# Altium PCB UV_Disinfection_Relay_Hw00.PcbDoc
Units mm, origin at the board's own origin, x right, y up, seen from the top; angles counter-clockwise.
Board outline 71 x 68 mm, 2 copper layers (Top Layer, Bottom Layer); 31 components, 16 nets, 89 pads, 0 vias.
Unrouted connection lines stored in the file: 6.
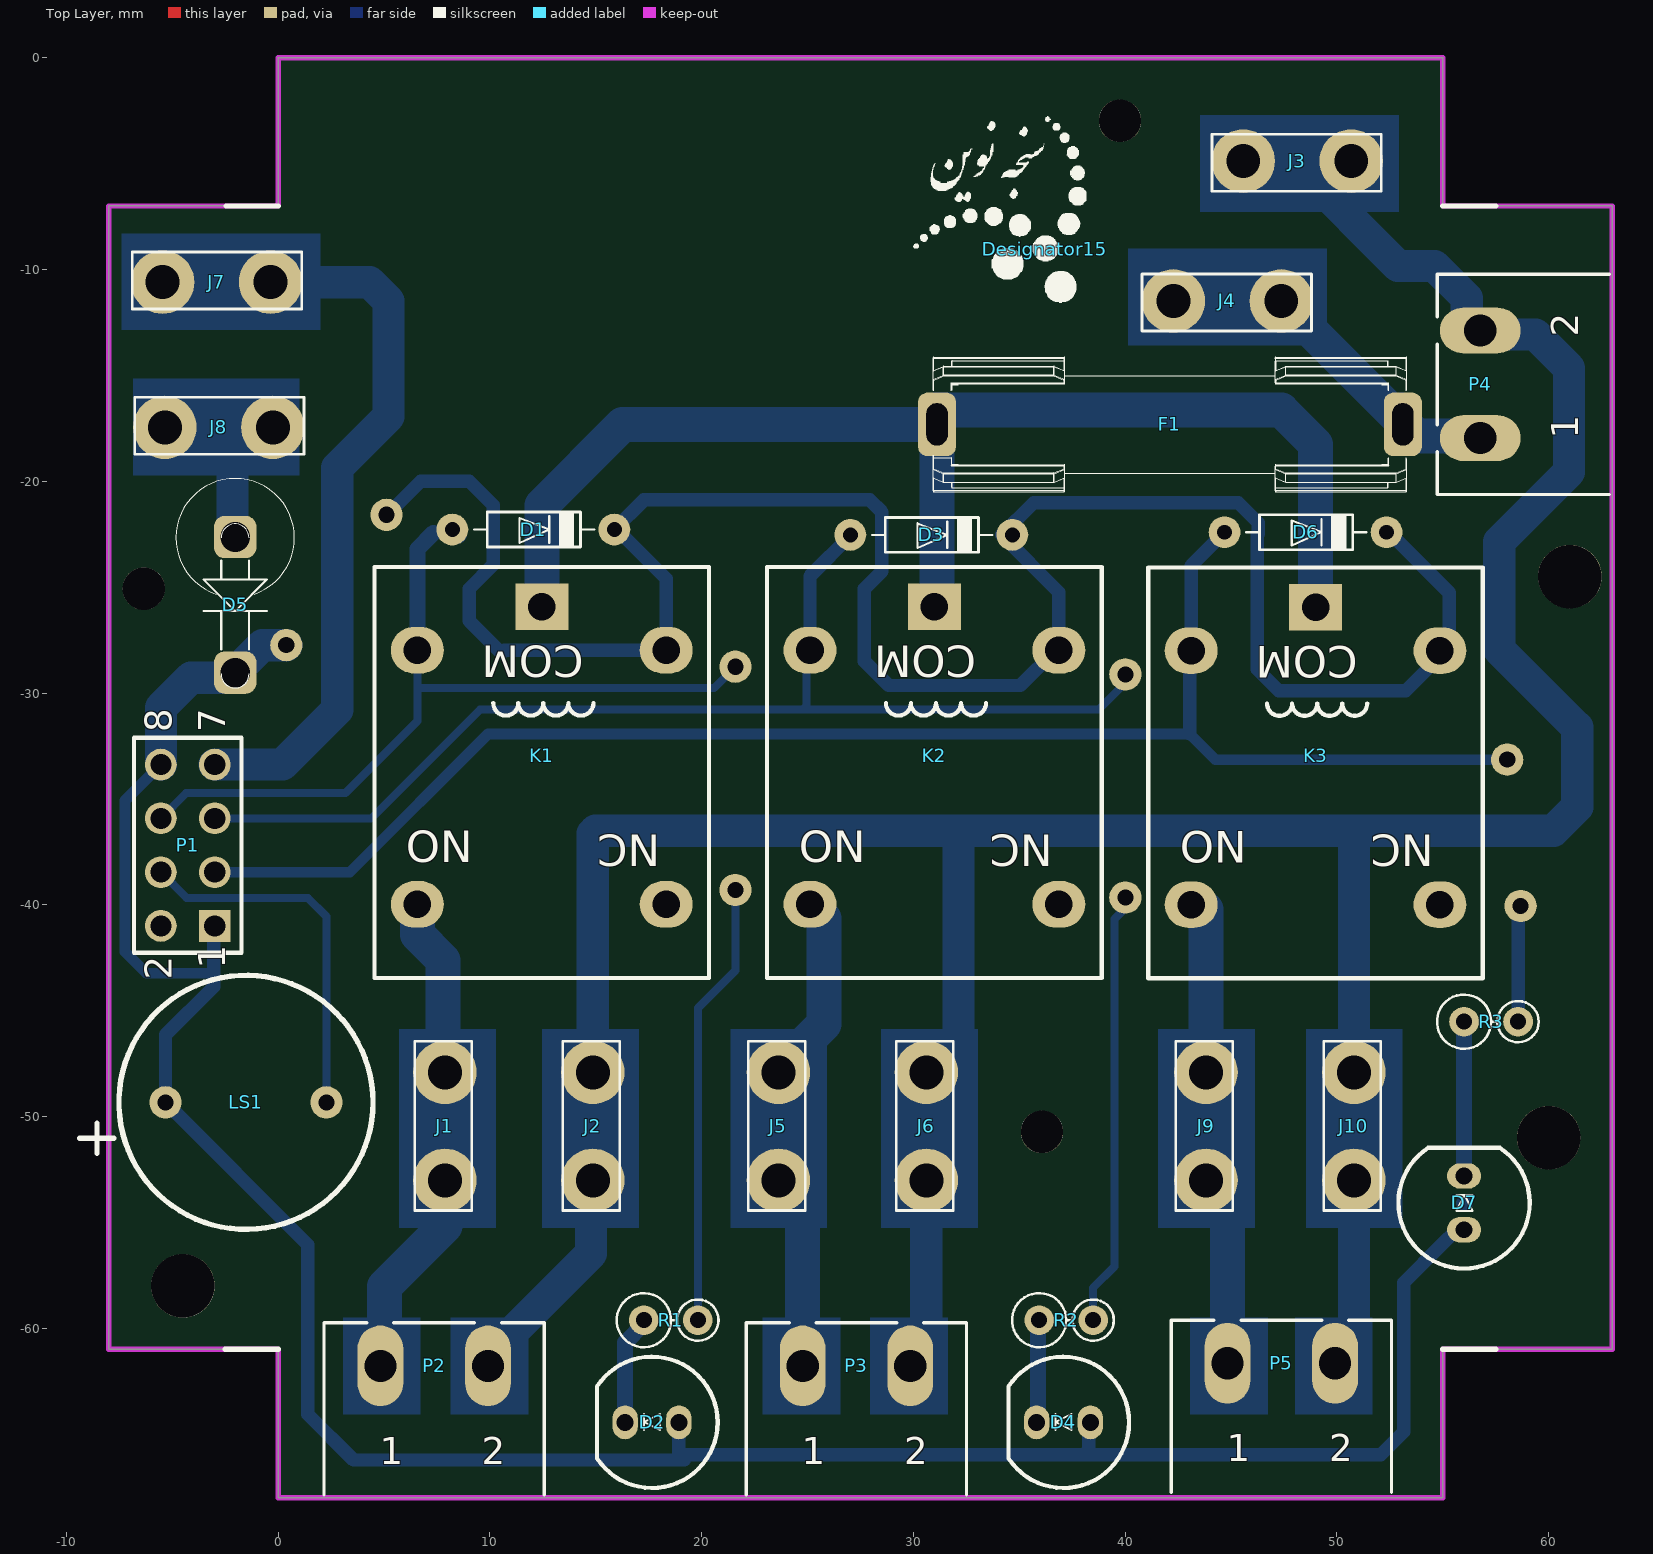
[diagram p0: Top Layer view]
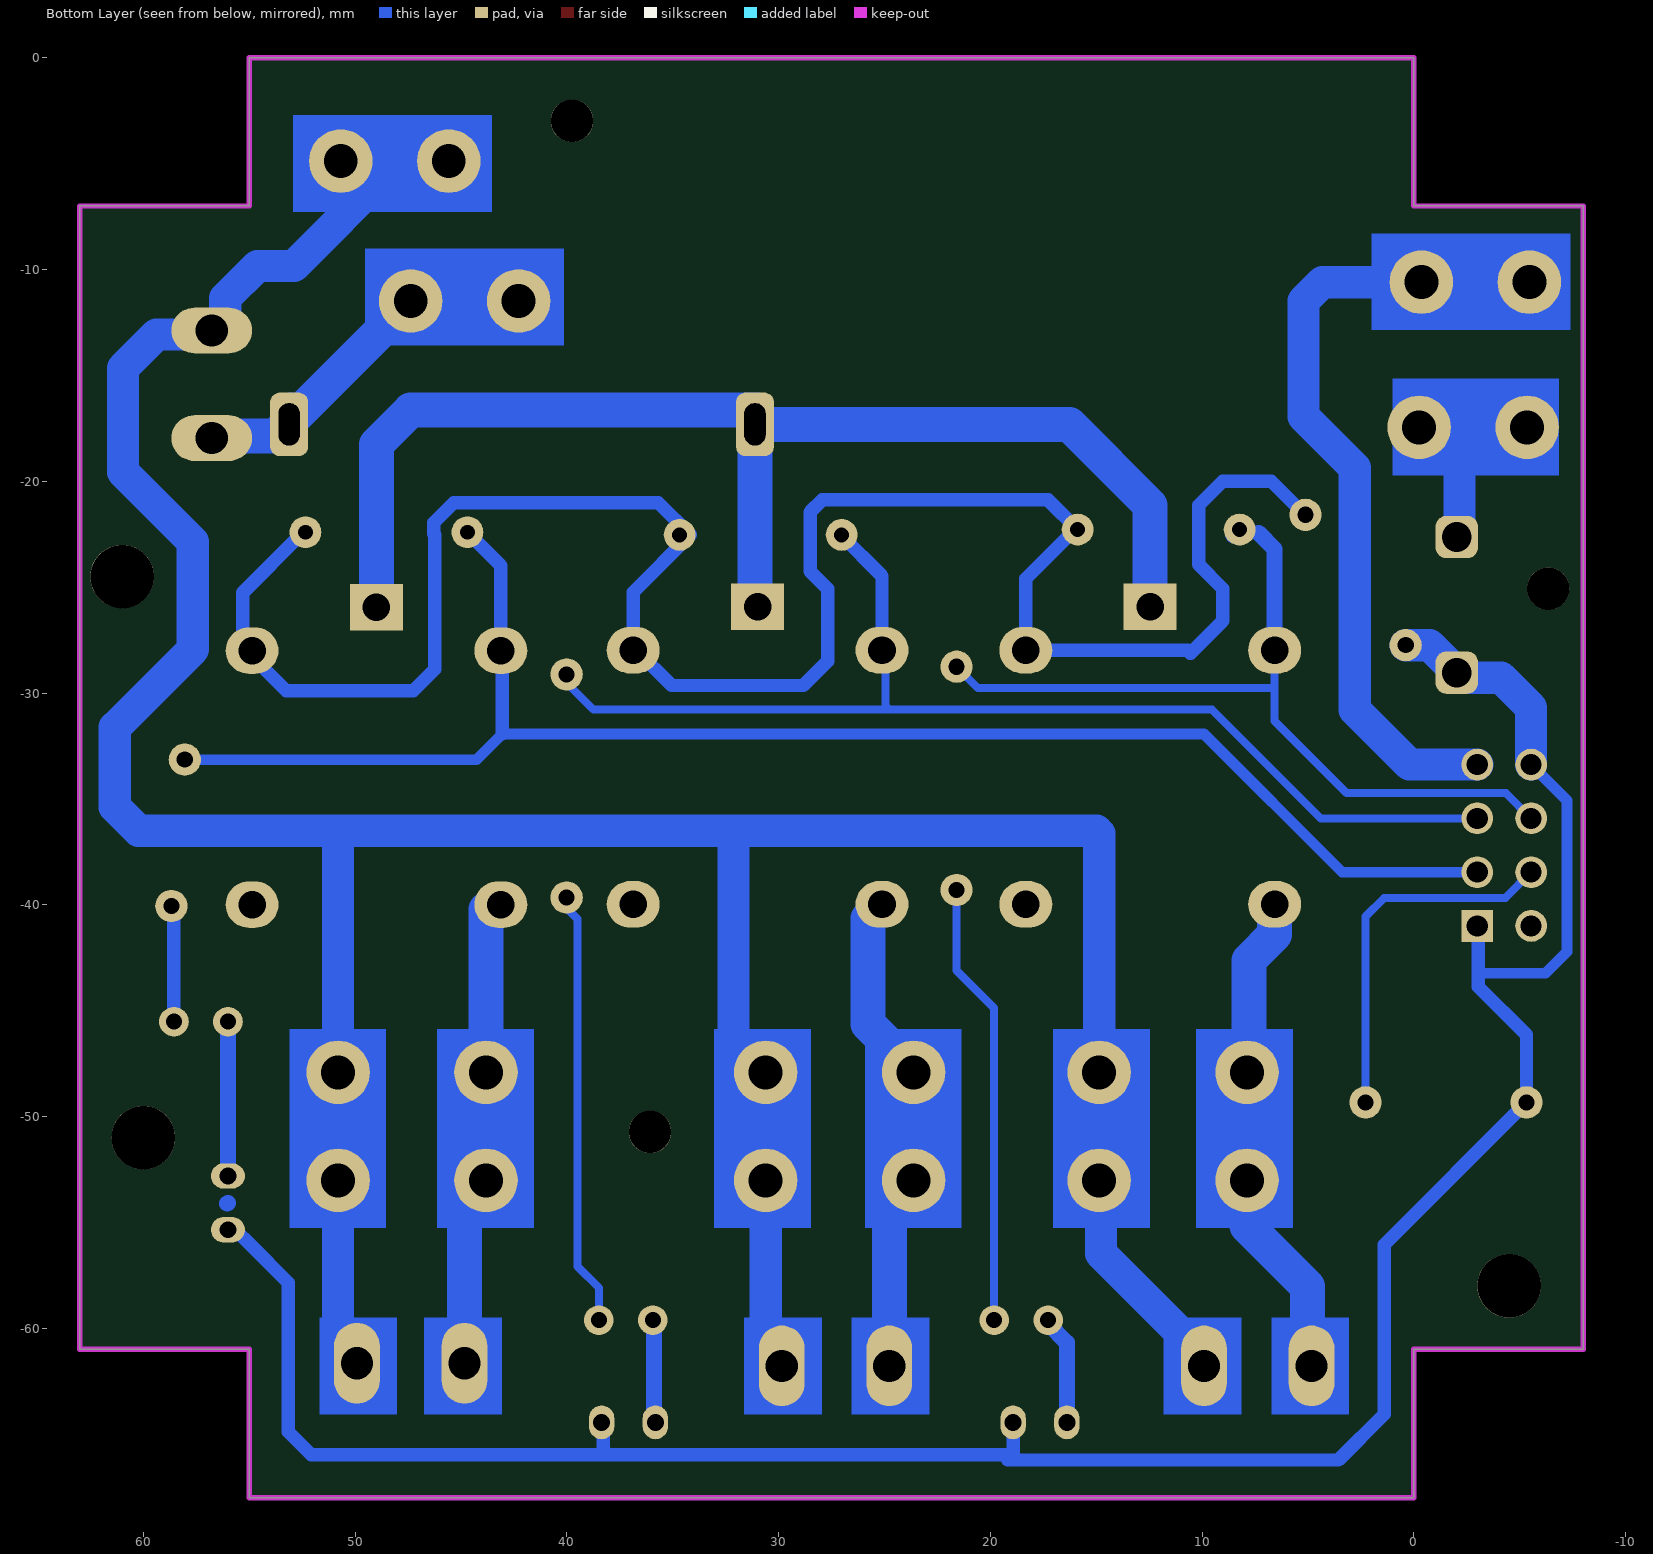
[diagram p1: Bottom Layer view, seen from below]
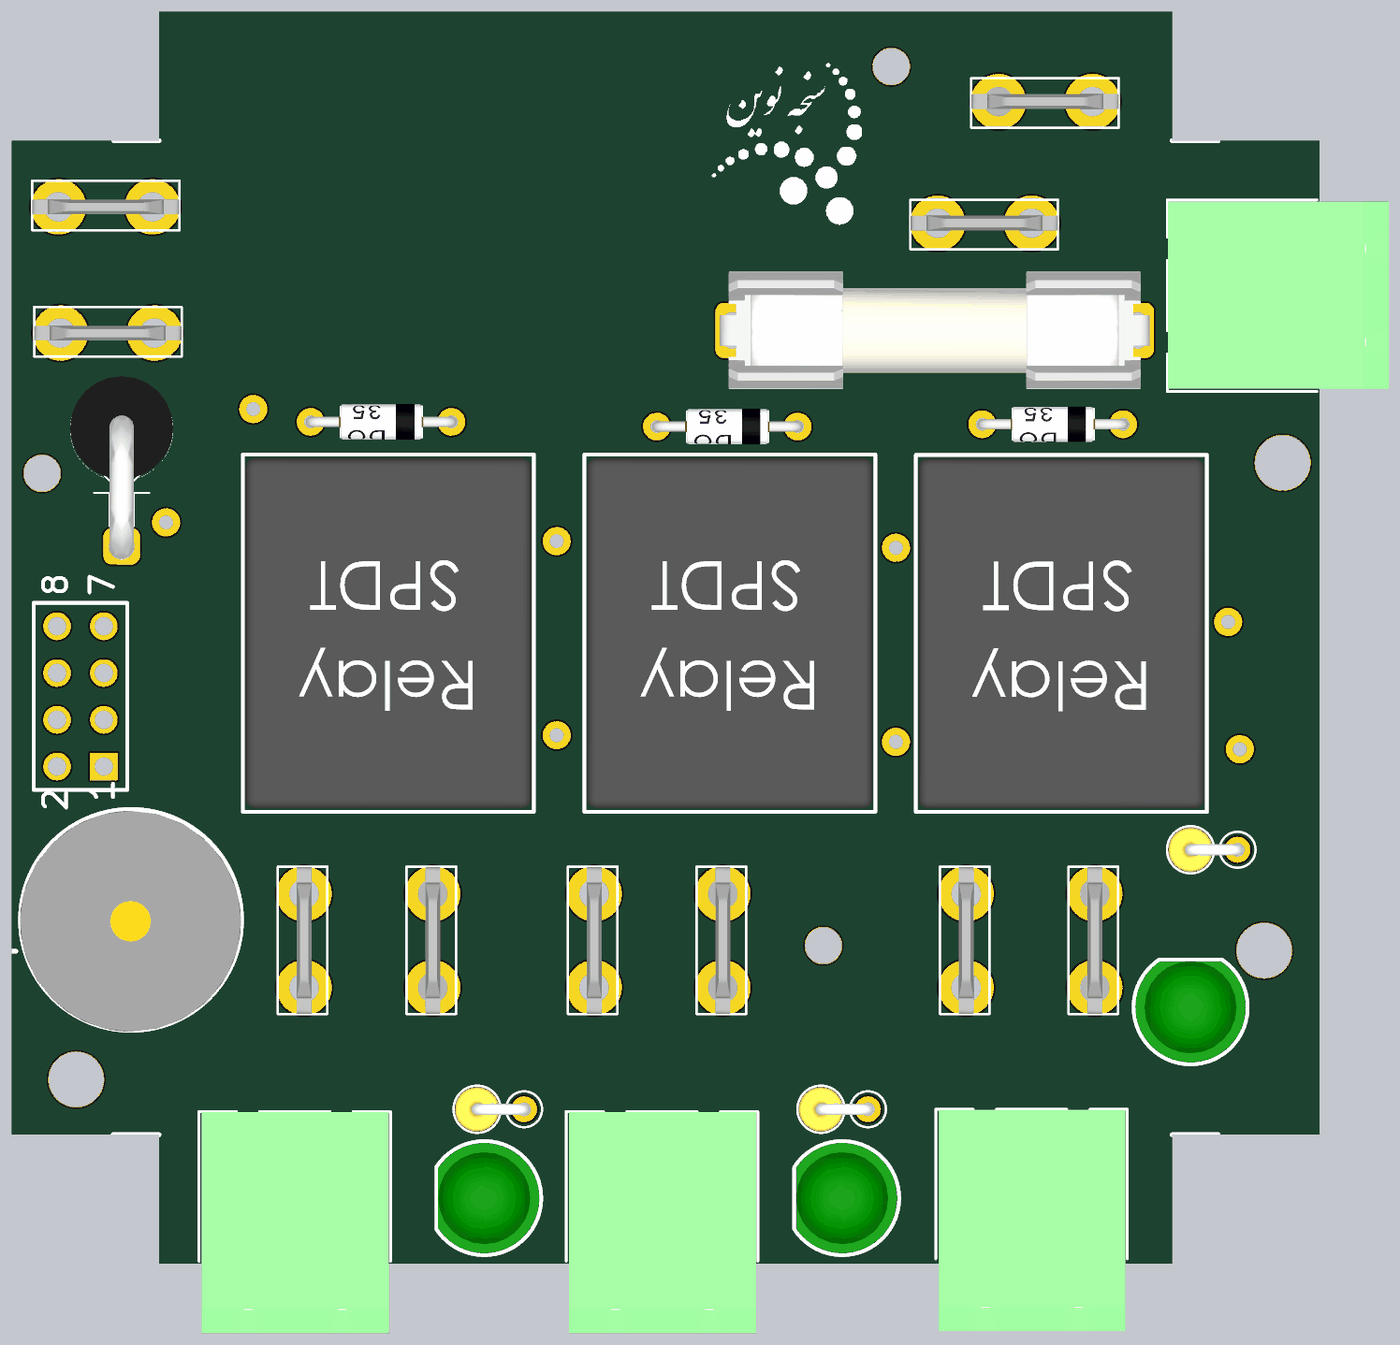
[diagram p2: 3D render of the assembled board from above, using the file's embedded part models]

## Layer stack, top to bottom
Top Solder: solder mask 0.0102, Solder Resist, Dk 3.5
Top Layer: signal copper 0.0356
Dielectric 1: dielectric 0.32, FR-4, Dk 4.8
Bottom Layer: signal copper 0.0356
Bottom Solder: solder mask 0.0102, Solder Resist, Dk 3.5

## Board outline
-8,-61 -8,-7 0,-7 0,0 55,0 55,-7 63,-7 63,-61 55,-61 55,-68 0,-68 0,-61

## Design rules (kind name [scope] priority, off if disabled: settings)
Clearance [All] p1: gap=0.254 ignorepadtopadclearanceinfootprint=TRUE
ComponentClearance [All] p1 off: gap=0.254 collisioncheckmode=3 verticalgap=0.254 showdistances=FALSE
HoleSize [All] p1: absolutevalues=TRUE maxlimit=25.4 minlimit=0.025 maxpercent=80.000 minpercent=20.000
PolygonConnect [All] p1: connectstyle=Relief reliefconductorwidth=0.254 reliefentries=4 polygonreliefangle="90 Angle" airgapwidth=0.254
RoutingVias [All] p1: holewidth=0.711 width=1.27 viastyle="Through Hole" minholewidth=0.711 minwidth=1.27 maxholewidth=0.711 maxwidth=1.27
SolderMaskExpansion [All] p1: expansion=0.102 istentingtop=FALSE
Width [All] p1: maxlimit=5.08 minlimit=0.254 preferedwidth=0.508 minimp=50.000000 maximp=50.000000 favimp=50.000000
28 further rules are at their usual default settings.

## Components (designator, comment, footprint, x,y, rotation, side; value= is the part's Value field where it differs from the comment)
D1 "1n4148" "DO 35" 12.05,-22.28 r180 top
D2 "LED0" LED5MM_GRN 17.653,-64.444 r180 top
D3 "1n4148" "DO 35" 30.846,-22.534 r180 top
D4 "LED0" LED5MM_GRN 37.084,-64.444 r180 top
D5 "Diode 1N4007" "DO-201AD - vertical" -2.032,-25.836 r270 top
D6 "1n4148" "DO 35" 48.514,-22.407 r180 top
D7 "LED0" LED5MM_GRN 56.002,-54.079 r90 top
Designator15 "Comment" LOGO_PARS_TOP 36.195,-9.017 r0 top
F1 "F=1.0 A" "Fuse 5x20" 42.112,-17.311 r90 top
J1 "Phase_RELAY2" COOLER_TEMINAL_M_6.3MM#1 7.874,-53.014 r90 top
J2 "NULL" COOLER_TEMINAL_M_6.3MM#2 14.859,-53.014 r90 top
J3 "NULL" COOLER_TEMINAL_M_6.3MM#2 50.673,-4.881 r180 top
J4 "Phase" COOLER_TEMINAL_M_6.3MM#1 47.371,-11.485 r180 top
J5 "Phase_RELAY2" COOLER_TEMINAL_M_6.3MM#1 23.622,-53.014 r90 top
J6 "NULL" COOLER_TEMINAL_M_6.3MM#2 30.607,-53.014 r90 top
J7 "Positive" COOLER_TEMINAL_M_6.3MM#1 -5.461,-10.596 r0 top
J8 "Negative" COOLER_TEMINAL_M_6.3MM#1 -5.354,-17.454 r0 top
J9 "Phase_RELAY2" COOLER_TEMINAL_M_6.3MM#1 43.815,-53.014 r90 top
J10 "NULL" COOLER_TEMINAL_M_6.3MM#2 50.8,-53.014 r90 top
K1 "RELAY_MILON_5V" "Relay 18.85x15.35x15.70" 12.447,-32.955 r180 top
K2 "RELAY_MILON_5V" "Relay 18.85x15.35x15.70" 30.989,-32.955 r180 top
K3 "RELAY_MILON_5V" "Relay 18.85x15.35x15.70" 48.989,-32.97 r180 top
LS1 "Buzzer" BUZZER_12A05 -1.524,-49.331 r180 top
P1 "Header 4X2" HDR2X4 -3,-41 r90 top
P2 "Header 2" "MSTB 2,5/2-G-5,08" 7.366,-61.777 r0 top
P3 "Header 2" "MSTB 2,5/2-G-5,08" 27.305,-61.777 r0 top
P4 "Header 2" "MSTB 2,5/2-G-5,08" 56.769,-15.422 r90 top
P5 "Header 2" "MSTB 2,5/2-G-5,08" 47.371,-61.65 r0 top
R1 "1K" "Axial 0_25w_2_54mm" 18.542,-59.618 r0 top
R2 "1K" "Axial 0_25w_2_54mm" 37.211,-59.618 r0 top
R3 "1K" "Axial 0_25w_2_54mm" 57.277,-45.521 r0 top

## Footprints (in the part's own frame and the unit in brackets; to place one, negate y for a bottom-side part, rotate by r counter-clockwise, add the part's x,y. Pads: shape width x height; smd on the part's side, far side on the other; paste and mask are expansions set on the pad)
"Axial 0_25w_2_54mm" [mm] "Designer Abbas Basereh"
  round 1.4 hole 0.75: 1(1.275,0) 2(-1.275,0)
  silkscreen extent -2.55,-1.28 2.25,1.28, body extent -2.47,-1.2 1.57,1.2, height 9.4
BUZZER_12A05 [mil]
  round 60 hole 30: 1(149.61,0) 2(-149.61,0)
  silkscreen extent -236,-236 309,236, body extent -235,-233 237,239, height 374
COOLER_TEMINAL_M_6.3MM#1 [mm] "PC250 6.3mm Cooler Male Terminal"
  round 3 hole 1.6: 1(0,0) 1(5.1,0)
  silkscreen extent -1.43,-1.27 6.58,1.42, body extent -1.43,-0.41 6.57,0.39, height 11
COOLER_TEMINAL_M_6.3MM#2 [mm] "PC250 6.3mm Cooler Male Terminal"
  round 3 hole 1.6 mask+0.102: 1(0,0) 1(5.1,0)
  silkscreen extent -1.43,-1.27 6.58,1.42, body extent -1.43,-0.41 6.57,0.39, height 11
"DO 35" [mm] "Diode"
  round 1.5 hole 0.7: 1(3.825,0) 2(-3.825,0)
  silkscreen extent -2.87,-0.85 2.8,0.85, body extent -4.1,-0.96 4.08,0.96, height 2.46
"DO-201AD - vertical" [mm] "Designer Abbas Basereh"
  rrect50% 2x2 hole 1.4: 1(-3.2,0) 2(3.2,0)
  silkscreen extent -5.96,-2.8 3.93,2.8, body extent -6.04,-2.8 3.84,2.8, height 15.69
"Fuse 5x20" [mm] "Dsigner : Abbas Basereh"
  rrect50% 3x1.8 hole 1 slot 2 at 0 deg: 1(0,11) 2(0,-11)
  silkscreen extent -3.18,-11.19 3.18,11.19, body extent -3.17,-11.69 3.17,11.69, height 8.63
HDR2X4 [mm] "Connector; Header; 4x2 Position"
  rect 1.5x1.5 hole 1: 1(0,0)
  round 1.5 hole 1: 2(0,2.54) 3(2.54,0) 4(2.54,2.54) 5(5.08,0) 6(5.08,2.54) 7(7.62,0) 8(7.62,2.54)
  silkscreen extent -1.27,-1.27 8.89,3.81
LED5MM_GRN [mm] "LED 5MM THROUGH HOLE GREEN-Designer Abbas Basereh"
  oval 1.2x1.6 hole 0.8: 1(-1.27,0) 2(1.27,0)
  silkscreen extent -3.1,-3.1 2.6,3.1, body extent -3,-3 2.5,3, height 9.14
LOGO_PARS_TOP [mm]
  silkscreen extent -6.2,-2.54 1.96,6.25
"MSTB 2,5/2-G-5,08" [mil] "Header, Nominal current: 12 A Rated voltage (III/2): 320 V Number of positions: 2 Pitch: 5.08 mm Color: green Contact surface: Tin Assembly: Soldering DESIGNER:ABBAS BASEREH"
  oval 85x150 hole 60: 1(-100,0)
  oval 85x150 hole 60 mask+4: 2(100,0)
  silkscreen extent -205,-240 205,80, body extent -199,-394 201,79, height 340
"Relay 18.85x15.35x15.70" [mm] "DESIGNER ABBAS BASEREH"
  rect 2.5x2.2 hole 1.3: 1(0,-7.025)
  oval 2.5x2.2 hole 1.3: 2(-5.875,7.025) 3(5.875,7.025) 4(-5.875,-4.975) 5(5.875,-4.975)
  silkscreen extent -7.9,-8.9 7.9,10.5, body extent -7.75,-8.7 7.75,10.3, height 15.6

## Part data
D1 D3 D6: library part "Diode 1N4007", "1 Amp General Purpose Rectifier", Code_JEDEC=DO-204-AL, ComponentLink1Description="Manufacturer Link", ComponentLink1URL=http://www.fairchildsemi.com/, ComponentLink2Description=Datasheet, ComponentLink2URL=http://www.fairchildsemi.com/ds/1N%2F1N4001.pdf, DatasheetVersion=1998, LatestRevisionDate=17-Jul-2002, LatestRevisionNote="Re-released for DXP Platform.", PackageDescription="Diode, Axial; Body 5.2 x 2.7 mm (LxDia. max), Lead Dia. 0.86 mm (max)", PackageReference=DO-41, PackageVersion=Aug-1999, Published=8-Jun-2000, Publisher="Altium Limited"
D2 D4 D7: "Typical INFRARED GaAs LED", LatestRevisionDate=08-Jul-2005, LatestRevisionNote="Mech Layer 1 removed.", PackageDescription="LED; 2 Leads", PackageReference=LED-0, Published=8-Jun-2000, Publisher="Altium Limited"
D5: "1 Amp General Purpose Rectifier", Code_JEDEC=DO-204-AL, ComponentLink1Description="Manufacturer Link", ComponentLink1URL=http://www.fairchildsemi.com/, ComponentLink2Description=Datasheet, ComponentLink2URL=http://www.fairchildsemi.com/ds/1N%2F1N4001.pdf, DatasheetVersion=1998, LatestRevisionDate=17-Jul-2002, LatestRevisionNote="Re-released for DXP Platform.", PackageDescription="Diode, Axial; Body 5.2 x 2.7 mm (LxDia. max), Lead Dia. 0.86 mm (max)", PackageReference=DO-41, PackageVersion=Aug-1999, Published=8-Jun-2000, Publisher="Altium Limited"
F1: library part "Fuse 5x20 with holdeer pins", "Fuses 5x20", Data=28-12-2016, Desc.="fuse with holder pins 5x20", Designer="Abbas Basereh"
J1 J2 J3 J4 J5 J6 J7 J8 J9 J10: library part Socket, "Socket", LatestRevisionDate=17-Jul-2002, LatestRevisionNote="Re-released for DXP Platform.", Publisher="Altium Limited"
K1 K2 K3: library part Relay_SPDT, "RELAY 5V 7A 1C 5PIN", ComponentLink1Description=Datasheet, Designer="Abbas Basereh", Mounting Technology=Through-Hole, Pin Count=0, Update Date=2017-3-1
LS1: "Magnetic Transducer Buzzer", ComponentLink1Description="Manufacturer Link", ComponentLink1URL=http://www.megastar.com/linecard/buzzmode/index.php, DatasheetVersion=17-Dec-2003, LatestRevisionDate=17-Dec-2003, LatestRevisionNote="Schematic revised, PCB Footprint replaced.", PackageDescription="Magnetic Transducer Buzzer", PackageReference=ABSM-1574, Published=24-Mar-1999, Publisher="Altium Limited"
P1: "Header, 4-Pin, Dual row", LatestRevisionDate=17-Jul-2002, LatestRevisionNote="Re-released for DXP Platform.", Publisher="Altium Limited"
P2 P3 P4 P5: "Header, 2-Pin", LatestRevisionDate=17-Jul-2002, LatestRevisionNote="Re-released for DXP Platform.", Publisher="Altium Limited"
R1 R2 R3: library part Res1, "Resistor", LatestRevisionDate=17-Jul-2002, LatestRevisionNote="Re-released for DXP Platform.", PackageDescription="Axial Device, Thru-Hole; 2 Leads; 0.3 in Pin Spacing", PackageReference=AXIAL-0.3, Published=8-Jun-2000, Publisher="Altium Limited"

## Free pads (board coordinates)
  round 2 hole 2: 4(-6.35,-25.074) 4(36.068,-50.728) 4(39.751,-2.976)
  round 3 hole 3: 4(-4.5,-58) 4(60,-51) 4(61,-24.5)
  round 1.524 hole 0.762: 5(5.115,-21.582) 5(21.59,-39.298) 5(40.005,-39.66) 5(58.674,-40.06) 6(0.381,-27.741) 6(21.59,-28.757) 6(40.005,-29.119) 6(58.039,-33.147)

## Nets (pads, with @x,y where several pads share a name; then routed paths per layer and width w, separated by ;. In a path a pad name is that pad's centre, name@x,y a point inside that pad or via, vN(x,y) a via of type N, cw(c..) or ccw(c..) an arc to the next point about the centre after c; other vN are vias at no path point)
+5V: D1.2 D2.1 D3.2 D4.1 D5.2 D6.2 D7.1 K1.4 K2.4 K3.4 LS1.1 P1.1 P1.8 pad.5@5.115,-21.582 pad.6@0.381,-27.741 | length 221.7
  Bottom Layer w0.508: P1.8 -7.239,-35.079 -7.239,-42.219 -6.223,-43.235 -3.048,-43.235
  Bottom Layer w0.635: P1.1 -3.048,-41.048 -3.048,-43.235 -3.048,-43.87 -5.324,-46.146 LS1.1 1.397,-56.052 1.397,-64.063 3.556,-66.222 18.923,-66.222 19.177,-66.222 18.923,-65.968 ; pad.5@5.115,-21.582 5.143,-21.582 6.731,-19.994 9.017,-19.994 10.16,-21.137 10.16,-23.931 9.017,-25.074 9.017,-26.598 10.532,-28.113 10.55,-28.113 10.683,-27.98 K1.4 18.322,-24.606 D1.2@16.25,-22.534 ; D1.2 17.272,-20.883 27.94,-20.883 28.512,-21.455 28.512,-24.249 27.686,-25.074 27.686,-28.503 28.829,-29.646 35.048,-29.646 36.714,-27.98 K2.4 36.864,-25.241 34.157,-22.534 35.681,-21.01 45.339,-21.01 46.282,-21.953 46.282,-22.48 46.228,-22.534 46.228,-28.884 47.244,-29.9 53.242,-29.9 55.162,-27.98 55.312,-27.98 55.312,-25.274 D6.2@52.572,-22.534 ; D2.1 18.923,-65.968 ; D4.1 38.27,-64.528 38.27,-65.732 38.035,-65.968 ; D7.1 55.649,-55.349 54.936,-56.062 53.15,-57.848 53.15,-64.889 52.07,-65.968 38.27,-65.968 38.035,-65.968 ; 18.923,-65.968 19.177,-65.968 38.035,-65.968
  Bottom Layer w1.524: P1.8 -5.54,-30.694 -4.12,-29.274 -2.27,-29.274 D5.2 -0.737,-27.741 pad.6@0.381,-27.741
BUZZER_A: LS1.2 P1.4 | length 17.5
  Bottom Layer w0.381: P1.4 -4.321,-39.679 1.397,-39.679 2.276,-40.558 LS1.2
GND: J7.1 P1.2 P1.7 | length 38.2
  Bottom Layer w1.524: J7.1@-5.461,-10.596 -0.361,-10.596 4.314,-10.596 5.207,-11.489 5.207,-16.946 2.794,-19.359 2.794,-30.789 0.203,-33.38 P1.7
NetD2_2: D2.2 R1.2 | length 5.2
  Bottom Layer w0.762: D2.2 16.383,-60.675 17.267,-59.791 R1.2
NetD4_2: D4.2 R2.2 | length 4.9
  Bottom Layer w0.762: D4.2 35.875,-64.383 35.875,-59.679 R2.2
NetD5_1: D5.1 J8.1 | length 10.3
  Bottom Layer w1.524: J8.1@-5.354,-17.454 -2.159,-17.454 ; D5.1 -2.159,-22.509 -2.159,-17.454 ; J8.1@-0.254,-17.454 -2.159,-17.454
NetD7_2: D7.2 R3.2 | length 7.3
  Bottom Layer w0.762: 56.002,-54.079 56.037,-54.114 ; D7.2 R3.2
NetF1_2: F1.2 J4.1 P4.1 | length 12.8
  Bottom Layer w1.651: J4.1@47.371,-11.485 F1.2@53.037,-17.151 ; F1.2@53.037,-16.637 F1.2@53.037,-17.151 ; F1.2 53.037,-17.237 F1.2@53.037,-17.151 ; P4.1 56.672,-17.865 53.751,-17.865 F1.2@53.037,-17.151
NetJ1_1: J1.1 K1.3 P2.1 | length 23.6
  Bottom Layer w1.651: P2.1 5.016,-61.587 5.016,-58.031 7.874,-55.173 7.874,-53.014 7.874,-47.914 7.786,-47.826 7.786,-42.622 6.572,-41.408 K1.3
NetJ5_1: J5.1 K2.3 P3.1 | length 21.7
  Bottom Layer w1.651: J5.1@23.622,-53.014 23.622,-47.914 23.622,-47.79 25.781,-45.631 25.781,-40.647 K2.3 ; P3.1 24.765,-54.281
NetJ9_1: J9.1 K3.3 P5.1 | length 20.6
  Bottom Layer w1.651: K3.3@43.562,-39.98 43.815,-40.233 43.815,-47.914 J9.1@43.815,-53.014 ; P5.1 44.831,-54.154
NULL: J2.1 J3.1 J6.1 J10.1 P2.2 P3.2 P4.2 P5.2 | length 171.9
  Bottom Layer w1.524: P2.2 9.906,-61.333 14.771,-56.468 14.771,-53.102 14.859,-53.014 14.859,-47.914 14.859,-36.631 14.986,-36.504 32.131,-36.504 ; P3.2 29.845,-60.883 30.607,-60.121 30.607,-53.014 30.607,-47.914 30.607,-47.79 32.131,-46.266 32.131,-36.504 ; J3.1@45.573,-4.881 48.387,-4.881 J3.1@50.673,-4.881 ; 48.387,-5.334 52.887,-9.834 54.61,-9.834 56.134,-11.358 56.134,-12.765 56.251,-12.882 P4.2 56.96,-13.073 59.373,-13.073 60.96,-14.66 60.96,-19.558 57.658,-22.86 57.658,-27.94 61.341,-31.623 61.341,-35.388 60.225,-36.504 50.8,-36.504 ; P5.2 49.911,-60.756 50.8,-59.867 50.8,-53.014 50.8,-47.914 50.8,-36.504 ; 32.131,-36.504 50.8,-36.504
PHASE_IN: F1.1 K1.1 K2.1 K3.1 | length 60.1
  Bottom Layer w1.651: K1.1 12.447,-21.138 12.446,-21.137 16.256,-17.327 30.347,-17.327 30.362,-17.311 30.962,-17.311 31.037,-17.237 31.037,-16.637 47.371,-16.637 48.989,-18.255 K3.1 K3.1@49.133,-25.802 ; K2.1 31.115,-25.804 F1.1@31.115,-17.962
RELAY1_A: D1.1 K1.5 P1.6 pad.5@21.59,-39.298 pad.6@21.59,-28.757 R1.1 | length 59.4
  Bottom Layer w0.381: P1.6 -4.345,-34.726 3.176,-34.726 6.572,-31.329 6.572,-29.9 ; K1.5 6.572,-29.9 ; R1.1 19.817,-44.881 21.59,-43.108 pad.5@21.59,-39.679 ; pad.6@21.59,-28.757 20.574,-29.773 6.699,-29.773 6.572,-29.9
  Bottom Layer w0.762: K1.5 6.572,-23.201 7.329,-22.444 ; D1.1@8.5,-22.555 D1.1@8.544,-22.511
RELAY2_A: D3.1 K2.5 P1.5 pad.5@40.005,-39.66 pad.6@40.005,-29.119 R2.1 | length 76.1
  Bottom Layer w0.381: P1.5 4.394,-35.92 9.525,-30.789 24.765,-30.789 ; K2.5 24.94,-28.155 24.94,-30.615 24.765,-30.789 ; R2.1 38.486,-58.089 39.497,-57.078 39.497,-40.676 40.386,-39.787 pad.5@40.386,-39.679 ; pad.6@40.386,-29.138 38.735,-30.789 24.765,-30.789
  Bottom Layer w0.635: K2.5 25.114,-24.477 D3.1@27.057,-22.534
RELAY3_A: D6.1 K3.5 P1.3 pad.5@58.674,-40.06 pad.6@58.039,-33.147 R3.1 | length 80.1
  Bottom Layer w0.508: P1.3 3.378,-38.46 9.906,-31.932 43.053,-31.932 44.268,-33.147 pad.6@58.039,-33.147
  Bottom Layer w0.635: 43.053,-31.932 43.053,-28.056 K3.5 43.114,-23.982 D6.1 ; R3.1 pad.5@58.552,-39.915
pads on no net: K1.2 K2.2 K3.2

## Keep-outs
Keep-Out Layer:
  the board outline again, w0.254

## Other copper
Bottom Layer:
  region net NetF1_2: 49.53,-13.589 49.53,-9.017 40.132,-9.017 40.132,-13.589
  region net NULL: 52.921,-7.278 52.921,-2.706 43.523,-2.706 43.523,-7.278
  region net GND: 1.994,-12.866 1.994,-8.294 -7.404,-8.294 -7.404,-12.866
  region net NetD5_1: 1.016,-19.724 1.016,-15.152 -6.858,-15.152 -6.858,-19.724
  rectangle net NULL: 48.53,-55.262 53.102,-45.864
  rectangle net NetJ9_1: 41.545,-55.262 46.117,-45.864
  rectangle net NULL: 28.464,-55.262 33.036,-45.864
  rectangle net NetJ5_1: 21.352,-55.262 25.924,-45.864
  rectangle net NULL: 12.462,-55.262 17.034,-45.864
  rectangle net NetJ1_1: 5.715,-55.262 10.287,-45.864
  rectangle net NetJ9_1: 43.053,-64.063 46.736,-59.491
  rectangle net NetJ5_1: 22.86,-64.063 26.543,-59.491
  rectangle net NetJ1_1: 3.048,-64.063 6.731,-59.491
  rectangle net NULL: 48.006,-64.063 51.689,-59.491
  rectangle net NULL: 27.94,-64.063 31.623,-59.491
  rectangle net NULL: 8.128,-64.063 11.811,-59.491

## Silkscreen, mask and mechanical layers (free items; w line width, h text height)
Top Overlay:
  lines w0.254: -2.5,-61 0,-61 ; -2.453,-7 0,-7 ; 55,-61 57.5,-61 ; 55,-7 57.5,-7

## Dimensions
0.254,-0.127 to 29.21,0.021 on Mechanical 15
0.254,-0.127 to 2.794,-19.359 on Mechanical 15
55,-68 to 52.646,-71.65 on Mechanical 15
0,-68 to 2.191,-71.777 on Mechanical 15
-8,-61 to -8,-7 on Mechanical 15
0,0 to 55,0 on Mechanical 15
-8,-7 to 63,-7 on Mechanical 15

## Text inside footprints (layer, text, board x,y; h text height)
K1: Top Overlay "COM" at 14.428,-27.773 h1.5 r180; Top Overlay "NO" at 9.196,-36.511 h1.5 r180; Top Overlay "NC" at 18.035,-36.689 h1.5 r180
K2: Top Overlay "COM" at 32.97,-27.773 h1.5 r180; Top Overlay "NO" at 27.738,-36.511 h1.5 r180; Top Overlay "NC" at 36.577,-36.689 h1.5 r180
K3: Top Overlay "COM" at 50.97,-27.788 h1.5 r180; Top Overlay "NO" at 45.738,-36.526 h1.5 r180; Top Overlay "NC" at 54.577,-36.704 h1.5 r180
P1: Top Overlay "2" at -5.032,-43.54 h1.27 r90; Top Overlay "1" at -2.492,-43.032 h1.27 r90; Top Overlay "7" at -2.492,-31.856 h1.27 r90; Top Overlay "8" at -5.032,-31.856 h1.27 r90
P2: Top Overlay "2" at 9.62,-66.412 h1.27; Top Overlay "1" at 4.794,-66.412 h1.27
P3: Top Overlay "2" at 29.559,-66.412 h1.27; Top Overlay "1" at 24.733,-66.412 h1.27
P4: Top Overlay "2" at 61.404,-13.168 h1.27 r90; Top Overlay "1" at 61.404,-17.994 h1.27 r90
P5: Top Overlay "2" at 49.625,-66.285 h1.27; Top Overlay "1" at 44.799,-66.285 h1.27